# Altium PCB RGB_driver_AC_2.PcbDoc
Units mm, origin at the board's own origin, x right, y up, seen from the top; angles counter-clockwise.
Board outline 80 x 43 mm, 2 copper layers (Top Layer, Bottom Layer), stack 1.635 mm thick; 70 components, 43 nets, 178 pads, 21 vias.
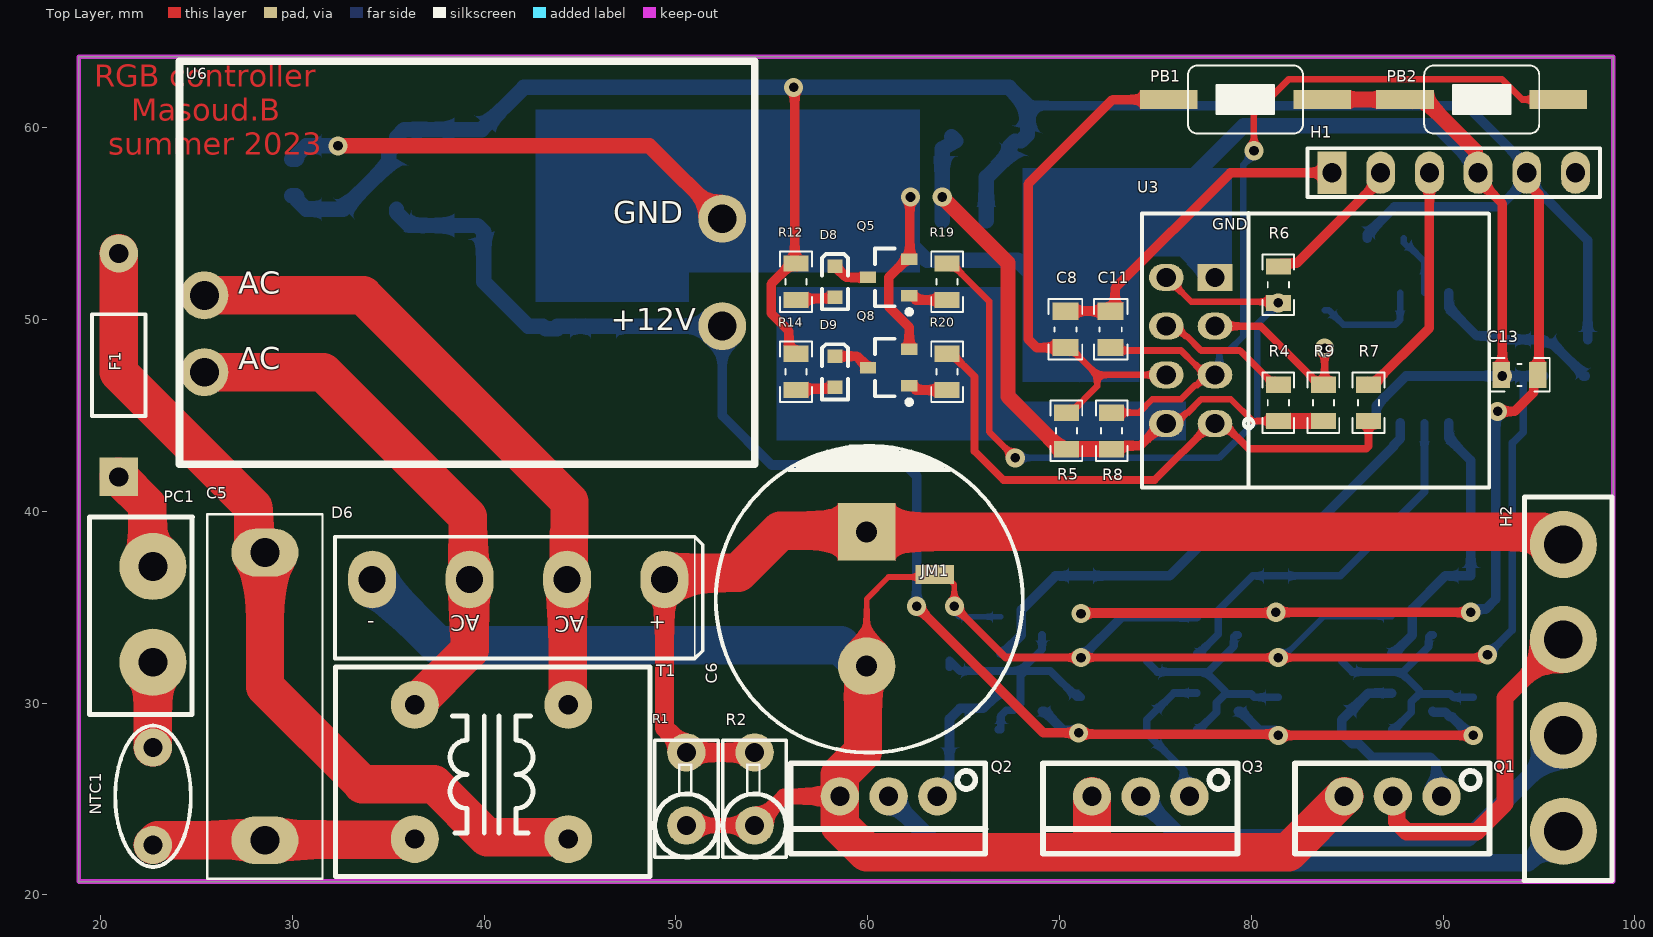
[diagram p0: Top Layer view]
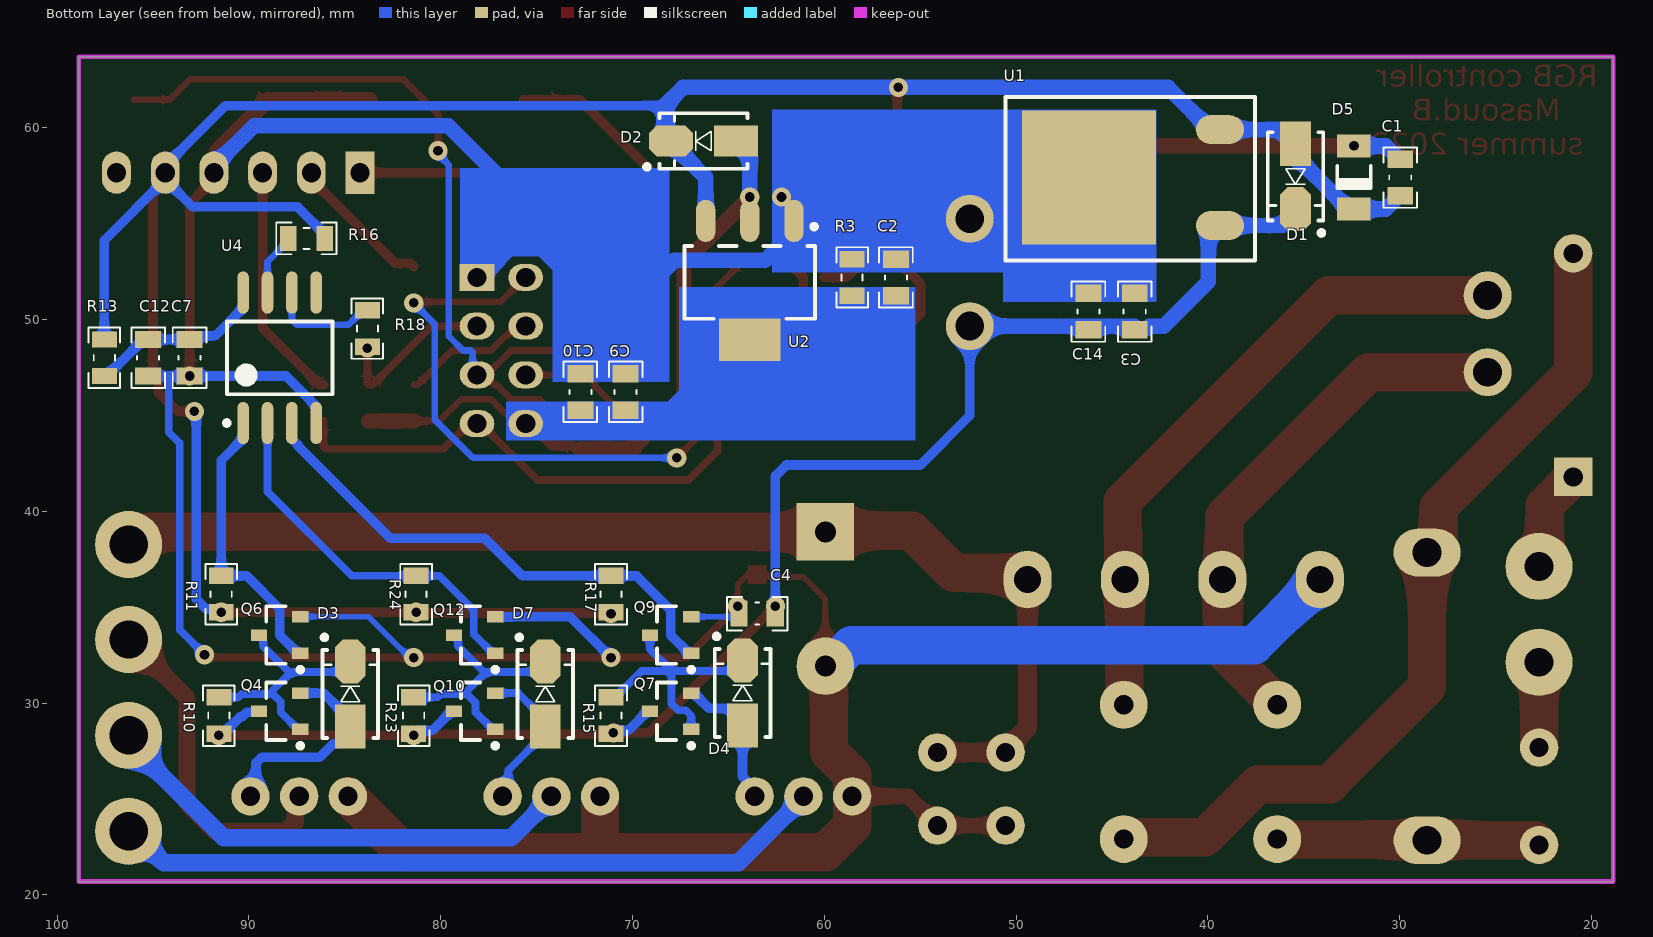
[diagram p1: Bottom Layer view, seen from below]
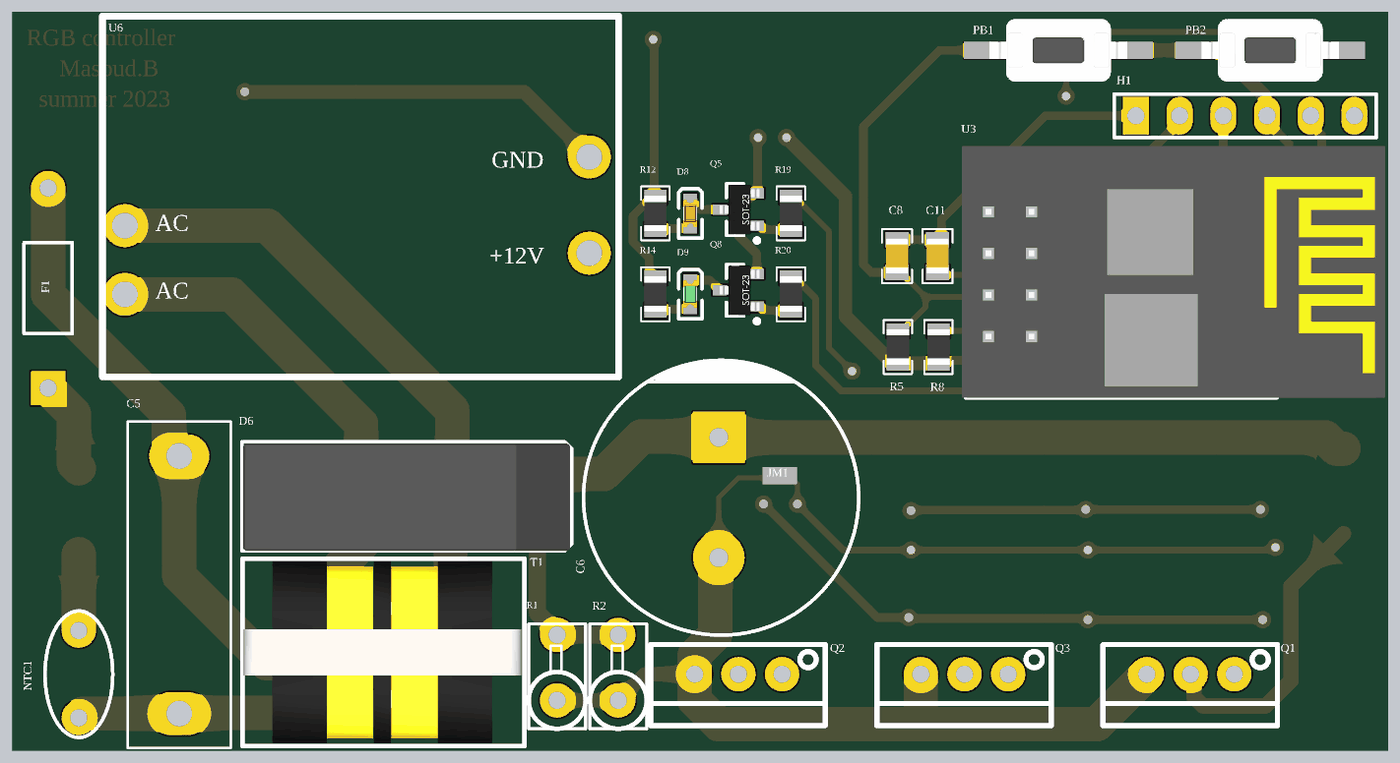
[diagram p2: 3D render of the assembled board from above, using the file's embedded part models]
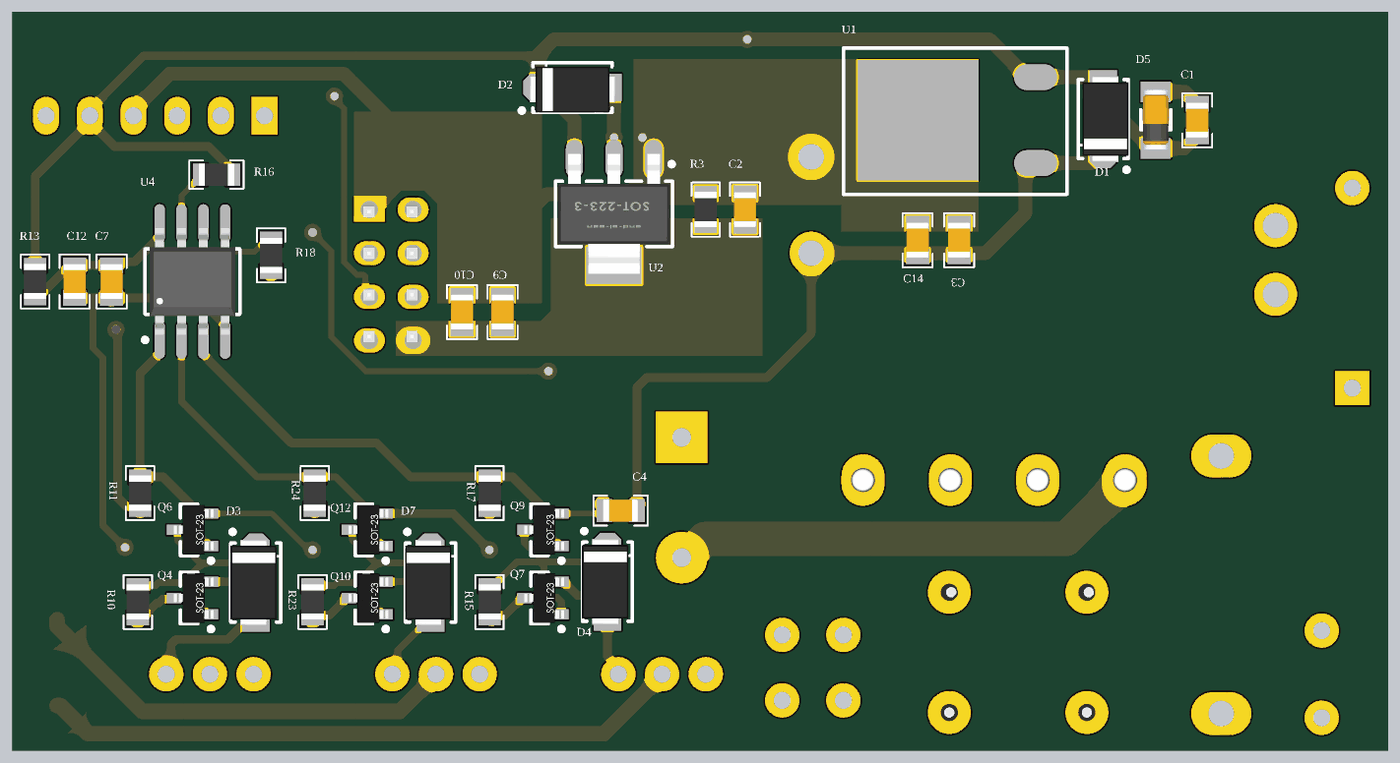
[diagram p3: 3D render of the assembled board from below, using the file's embedded part models]

## Layer stack, top to bottom
Top Solder: solder mask 0.0102, Solder Resist, Dk 3.5
Top Layer: signal copper 0.0175
Dielectric 1: dielectric 1.6, FR-4, Dk 4.8
Bottom Layer: signal copper 0.0175
Bottom Solder: solder mask 0.0102, Solder Resist, Dk 3.5

## Board outline
18.867,20.701 18.867,63.701 98.867,63.701 98.867,20.701

## Design rules (kind name [scope] priority, off if disabled: settings)
Clearance [All] p1: gap=0.4 ignorepadtopadclearanceinfootprint=TRUE except(0: Arc-Hole Track-Hole SMDPad-Hole THPad-Hole Via-Hole Fill-Hole Poly-Hole Region-Hole Text-Hole)
ComponentClearance [All] p1: gap=0.2 collisioncheckmode=3 verticalgap=0.1 showdistances=FALSE
Height [All] p1 off: minheight=0 maxheight=25.4 prefheight=12.7
PolygonConnect [All] p1: connectstyle=Relief reliefconductorwidth=0.254 reliefentries=4 polygonreliefangle="90 Angle" airgapwidth=0.254
RoomDefinition power [InComponentClass('power')] p1 off: confinementstyle=ConfineIn formatcopy=TRUE lockcomponents=FALSE outline 178.943,71.247 345.186,71.247 345.186,93.853 178.943,93.853
RoomDefinition micro [InComponentClass('micro')] p2 off: confinementstyle=ConfineIn formatcopy=TRUE lockcomponents=FALSE outline 226.761,109.728 324.043,109.728 324.043,138.176 226.761,138.176
RoomDefinition driver [InComponentClass('driver')] p3 off: confinementstyle=ConfineIn formatcopy=TRUE lockcomponents=FALSE outline 210.124,38.1 303.088,38.1 303.088,51.435 210.124,51.435
RoutingVias [All] p1: holewidth=0.7 width=1.2 viastyle="Through Hole" minholewidth=0.5 minwidth=1 maxholewidth=1 maxwidth=1.5
SolderMaskExpansion [All] p1: expansion=0.102 istentingtop=FALSE
Width [All] p1: maxlimit=2 minlimit=0.3 preferedwidth=0.3
28 further rules are at their usual default settings.

## Classes and differential pairs
component class power: C1 C2 C3 C5 C6 C14 D1 D2 D5 D6 F1 JM1 NTC1 PC1 R1 R2 R3 T1 U1 U2 U6
component class micro: C8 C9 C10 C11 D8 D9 H1 PB1 PB2 Q5 Q8 R4 R5 R6 R7 R8 R9 R12 R14 R19 R20 U3
component class driver: C4 C7 C12 C13 D3 D4 D7 H2 H-1 Q1 Q2 Q3 Q4 Q6 Q7 Q9 Q10 Q12 R10 R11 R13 R15 R16 R17 R18 R23 R24 U4

## Components (designator, comment, footprint, x,y, rotation, side; value= is the part's Value field where it differs from the comment)
C1 "cap 10uF" CAP0805 29.972,57.404 r90 bottom value=10uF
C2 "cap 10uF" CAP0805 56.261,52.197 r90 bottom value=10uF
C3 "cap 10uF" CAP0805 43.815,50.419 r90 bottom value=10uF
C4 "cap 100nF" CAP0805 63.5,34.671 r0 bottom value=100nF
C5 "cap 220nF" MKT-15mm 28.575,30.353 r90 top locked value=220nF
C6 "cap 47uF" CAP16MM 60.071,35.433 r270 top locked value=47uF
C7 "cap 100nF" CAP0805 93.091,48.006 r270 bottom value=100nF
C8 "cap 100nF" CAP0805 70.308,49.488 r90 top value=100nF
C9 "cap 100nF" CAP0805 70.358,46.228 r270 bottom value=100nF
C10 "cap 1uF" CAP0805 72.717,46.228 r90 bottom value=1uF
C11 "cap 10uF" CAP0805 72.667,49.488 r90 top value=10uF
C12 "cap 10uF" CAP0805 95.25,48.006 r270 bottom value=10uF
C13 "cap 10uF" CAP0805 93.98,47.117 r180 top value=10uF
C14 "cap 100nF" CAP0805 46.228,50.419 r90 bottom value=100nF
D1 "uf4007" DIOM4629X24N 35.433,57.465 r270 bottom
D2 "uf4007" DIOM4629X24N 66.294,59.309 r0 bottom
D3 "1n5822" DIOM4629X24N 84.709,30.48 r90 bottom
D4 "1n5822" DIOM4629X24N 64.262,30.529 r90 bottom
D5 "5.1V" "Diode 1n4148 SMD" 32.385,59.055 r270 bottom
D6 "KBP410" "Bridge KBL PACKAGE" 41.783,36.449 r180 top locked
D7 "1n5822" DIOM4629X24N 74.549,30.48 r90 bottom
D8 "RED" "LED_0603 R" 58.293,51.972 r90 top
D9 "GREEN" "LED_0603 G" 58.293,47.273 r90 top
F1 "1A" PIN-W2/E2.8 20.955,47.625 r90 top
H1 "H-1x6" H-1x6 90.678,57.658 r0 top locked
H2 "Phonix 4" "PHOENIX TERMINAL R 4" 116.205,20.748 r90 top
JM1 "Short Jumper" SHORT_BRIDGE 63.5,36.703 r0 top net-tie
NTC1 "NTC 10d9" CAPNTO5.08-7.37x3.94 22.733,25.146 r90 top
PB1 "Push-Button-tall" tack-sw-3x5x6 79.693,61.468 r180 top locked
PB2 "Push-Button-tall" tack-sw-3x5x6 92.011,61.468 r0 top locked
PC1 "Power Connector" "phoenix terminal R 2" 2.794,39.704 r270 top
Q1 "FQPF2N60C" TO-220 87.376,25.146 r180 top
Q2 "FQPF2N60C" TO-220 61.087,25.146 r180 top
Q3 "FQPF2N60C" TO-220 74.231,25.146 r180 top
Q4 "2N2222" SOT23_BEC_L 88.392,29.578 r0 bottom
Q5 "2N2222" SOT23_BEC_L 61.087,52.197 r180 top
Q6 "2N2222" SOT23_BEC_L 88.392,33.552 r0 bottom
Q7 "2N2222" SOT23_BEC_L 68.013,29.578 r0 bottom
Q8 "2N2222" SOT23_BEC_L 61.087,47.498 r180 top
Q9 "2N2222" SOT23_BEC_L 68.013,33.552 r0 bottom
Q10 "2N2222" SOT23_BEC_L 78.232,29.578 r0 bottom
Q12 "2N2222" SOT23_BEC_L 78.232,33.552 r0 bottom
R1 "Res 220K" RES-(1/2)-Stand 50.546,23.622 r90 top value=220K
R2 "Res 220K" RES-(1/2)-Stand 54.102,23.622 r90 top value=220K
R3 "Res 330R" RES0805 58.547,52.197 r270 bottom value=330R
R4 "Res 1K" RES0805 81.407,45.659 r90 top value=1K
R5 "Res 1K" RES0805 70.358,44.196 r90 top value=1K
R6 "Res 10R" RES0805 81.407,51.816 r90 top value=10R
R7 "Res 10R" RES0805 86.106,45.659 r270 top value=10R
R8 "Res 1K" RES0805 72.717,44.196 r270 top value=1K
R9 "Res 1K" RES0805 83.757,45.659 r270 top value=1K
R10 "Res 1K" RES0805 91.567,29.353 r270 bottom value=1K
R11 "Res 1K" RES0805 91.44,35.687 r90 bottom value=1K
R12 "Res 220" RES0805 56.261,51.972 r90 top value=220
R13 "Res 100R" RES0805 97.536,48.006 r90 bottom value=100R
R14 "Res 220" RES0805 56.261,47.273 r90 top value=220
R15 "Res 1K" RES0805 71.12,29.353 r270 bottom value=1K
R16 "Res 0R" RES0805 86.995,54.229 r180 bottom value=0R
R17 "Res 1K" RES0805 71.12,35.687 r90 bottom value=1K
R18 "Res 10R" RES0805 83.82,49.53 r90 bottom value=10R
R19 "Res 10K" RES0805 64.135,51.972 r270 top value=10K
R20 "Res 10K" RES0805 64.135,47.273 r270 top value=10K
R23 "Res 1K" RES0805 81.407,29.353 r270 bottom value=1K
R24 "Res 1K" RES0805 81.28,35.687 r90 bottom value=1K
T1 "UUD9-EMI filter" UUD9.8 40.386,26.416 r180 top locked
U1 "L7805CV" REG-7805-smd 39.37,57.404 r90 bottom
U2 "AMS1117-3.3" SOT223 63.881,51.943 r270 bottom
U3 "Header4*2Pin Female" ESP8266-01/ESP-01 78.105,48.387 r0 top locked
U4 "WS2811 SMD" 8S2_N 88.392,48.006 r90 bottom
U6 "Offline power supply module" "220AC-12VDC  450MA" 39.116,52.959 r0 top locked

## Footprints (in the part's own frame and the unit in brackets; to place one, negate y for a bottom-side part, rotate by r counter-clockwise, add the part's x,y. Pads: shape width x height; smd on the part's side, far side on the other; paste and mask are expansions set on the pad)
8S2_N [mm] "SOP, 8-Leads, Body 5.3x5.3mm, Pitch 1.27mm, IPC Medium Density"
  oval 2.2x0.6 smd: 1(-3.4,1.905) 2(-3.4,0.635) 3(-3.4,-0.635) 4(-3.4,-1.905) 5(3.4,-1.905) 6(3.4,-0.635) 7(3.4,0.635) 8(3.4,1.905)
  silkscreen extent -3.52,-2.75 1.9,2.88, body extent -3.1,-2.5 3.1,2.5, height 1.75
"220AC-12VDC  450MA" [mm] "110/220V AC to 12V DC 450mA Power Module"
  round 2.5 hole 1.5: 1(-13.7,-5.7) 2(-13.7,-1.7) 3(13.3,-3.3) 4(13.3,2.3)
  silkscreen extent -15,-10.5 15,10.5
"Bridge KBL PACKAGE" [mm] "KBL Bridge Rectifiers DESIGNER :ABBAS BASEREH"
  oval 2.5x3 hole 1.4: 1(-7.62,0) 2(-2.54,0) 3(2.54,0) 4(7.62,0)
  silkscreen extent -9.61,-2.22 9.56,4.13, body extent -9.51,-2.12 9.49,4.13, height 16.05
CAP16MM [mm]
  rect 3x3 hole 1.1: 1(-3.5,-0.127)
  round 3 hole 1.1: 2(3.5,-0.127)
  silkscreen extent -8,-7.99 8.01,8.01, body extent -8,-8 8,8, height 15
CAP0805 [mm] "Chip Capacitor, 2-Leads, Body 2/00x1/25mm, IPC Medium Density DESIGNER:ABBAS BASEREH"
  rect 0.9x1.35 smd: 1(-0.95,0) 2(0.95,0)
  silkscreen extent -1.58,-0.87 1.58,0.87, body extent -1.02,-0.65 1.02,0.65, height 0.5
CAPNTO5.08-7.37x3.94 [mm] "Capacitor, Radial, Tantalum, Non-Polarised; Body 7.37 x 3.94 x 6.86 mm (WxTxH max); Pin Spacing 5.08 mm (typ)"
  round 2 hole 1: 1(-2.54,0) 2(2.54,0)
  silkscreen extent -3.68,-1.98 3.68,1.96
"Diode 1n4148 SMD" [mm] "Mini MELF SOD-80"
  rect 1.2x1.75 smd: 1(0,0) 2(3.3,0)
  silkscreen extent 1.04,-0.87 2.22,0.88, body extent -0.13,-0.75 3.37,0.75, height 1.55
DIOM4629X24N [mm] "Molded Diode, 2-Leads, Body 4/60x2/90mm, IPC Medium Density-Design:Abbas Basereh"
  rect 2.3x1.6 smd: 1(-1.7,0)
  oct 2.3x1.6 smd: 2(1.7,0)
  silkscreen extent -2.3,-1.45 3.07,1.47, body extent -2.5,-1.22 2.5,1.48, height 2.2
ESP8266-01/ESP-01 [mm]
  oval 1.8x1.4 hole 1: 1(0,-3.81) 2(0,-1.27) 3(0,1.27) 5(-2.54,3.81) 6(-2.54,1.27) 7(-2.54,-1.27) 8(-2.54,-3.81)
  rect 1.8x1.4 hole 1: 4(0,3.81)
  silkscreen extent -3.81,-7.15 14.3,7.17, body extent -4.02,-7.15 20.57,7.5, height 10
H-1x6 [mm]
  rect 1.5x2.2 hole 1: 1(-6.477,0)
  oval 1.5x2.2 hole 1: 2(-3.937,0) 3(-1.397,0) 4(1.143,0) 5(3.683,0) 6(6.223,0)
  silkscreen extent -7.75,-1.27 7.49,1.27
"LED_0603 G" [mm]
  rect 0.7x0.8 smd: 1(-0.812,0) 2(0.813,0)
  silkscreen extent -1.44,-0.67 1.44,0.68, body extent -0.8,-0.4 0.8,0.4, height 0.6
"LED_0603 R" [mm]
  rect 0.7x0.8 smd: 1(-0.813,0) 2(0.813,0)
  silkscreen extent -1.44,-0.67 1.44,0.67, body extent -0.8,-0.4 0.8,0.4, height 0.6
MKT-15mm [mm]
  oval 2.5x3.5 hole 1.5: 1(-7.5,0) 2(7.5,0)
  silkscreen extent -9.5,-3 9.5,3
"phoenix terminal R 2" [mm] "2 Right terminals"
  round 3.5 hole 1.5: 1(2.573,19.939) 2(7.573,19.939)
  silkscreen extent 0,16.64 10.29,22
"PHOENIX TERMINAL R 4" [mm] "4 Right terminals"
  round 3.5 hole 2: 1(2.573,19.939) 2(7.573,19.939) 3(12.573,19.939) 4(17.526,19.939)
  silkscreen extent 0,17.4 20,22
PIN-W2/E2.8 [mm] "Thru-Hole; 2 Leads"
  rect 2x2 hole 1: 1(-5.825,0)
  round 2 hole 1: 2(5.825,0)
  silkscreen extent -2.65,-1.4 2.65,1.4
REG-7805-smd [mm]
  oval 1.5x2.5 smd: 1(-2.5,0) 3(2.5,0)
  rect 7x7 smd: 2(0,6.825)
  silkscreen extent -4.32,-1.82 4.19,11.18
RES0805 [mm] "Chip Resistor, 2-Leads, Body 2/00x1/25mm, IPC Medium Density DESIGNER:ABBAS BASEREH"
  rect 0.85x1.3 smd: 1(-0.95,0) 2(0.95,0)
  silkscreen extent -1.58,-0.82 1.58,0.82, body extent -1.02,-0.65 1.02,0.65, height 0.5
RES-(1/2)-Stand [mm]
  round 2 hole 1: 1(0,0) 2(3.81,0)
  silkscreen extent -1.65,-1.65 4.44,1.65, body extent -1.66,-1.67 4.14,1.67, height 11
SHORT_BRIDGE [mm]
  rect 1x1 smd mask+0.102: 1(-0.5,0) 2(0.5,0)
  Top Layer region: -0.5,-0.5 0.5,-0.5 0.5,0.5 -0.5,0.5
  body extent -1.02,-0.51 1.02,0.51
SOT23_BEC_L [mm] "SOT23, 3-Leads, Body 2.9x1.3mm, Pitch 0.95mm, Lead Span 2.4mm, IPC High Density"
  rect 0.85x0.6 smd: 1(-1.075,0.95) 2(-1.075,-0.95) 3(1.075,0)
  silkscreen extent -1.2,-1.5 0.7,1.92, body extent -1.23,-1.45 1.07,1.45, height 1
SOT223 [mm] "SOT223, 4-Leads, Body 6.5x3.5mm, Pitch 2.30mm-Designer Abbas Basereh"
  oval 2.2x1 smd: 1(-3.2,2.3) 2(-3.2,0) 3(-3.2,-2.3)
  rect 2.2x3.2 smd: 4(3,0)
  Top Layer pour cut-out: -1.7,3.556 1.7,3.556 1.7,-3.556 -1.7,-3.556
  silkscreen extent -3.02,-3.4 1.9,3.47, body extent -3.5,-3.25 3.5,3.25, height 1.7
tack-sw-3x5x6 [mm]
  rect 3x1 smd mask+0.05: 1(-4,0) 2(4,0)
  silkscreen extent -3,-1.78 3,1.78, body extent -4,-1.75 4,1.75, height 4.3
TO-220 [mm]
  round 2 hole 1: 1(-2.54,0) 2(0,0) 3(2.54,0)
  silkscreen extent -5.05,-1.72 5.1,3, body extent -5.05,-1.72 5.1,3, height 15.87
UUD9.8 [mm] "Line filter"
  round 2.5 hole 1: 1(4,3.5) 2(-4,-3.5) 3(-4,3.5) 4(4,-3.5)
  silkscreen extent -8.25,-5.46 8.13,5.46, body extent -8.08,-5.3 8.08,5.3, height 15.3

## Part data
C1 C2 C3 C12 C13: library part "Cap Pol1", "CAP seramic", LatestRevisionDate=17-Jul-2002, LatestRevisionNote="Re-released for DXP Platform.", PackageDescription="Polarized Capacitor (Radial); 2 Leads", PackageReference=RB7.6-15, Published=8-Jun-2000, Publisher="Altium Limited"
C4 C7 C8 C9 C10 C11 C14: library part "Cap ceramic", "CAP seramic"
C5: library part Cap, "Cap MKT 275V", LatestRevisionDate=17-Jul-2002, LatestRevisionNote="Re-released for DXP Platform.", PackageDescription="Radial Cap, Thru-Hole; 2 Leads; 0.3 in Pin Spacing", PackageReference=RAD-0.3, Published=8-Jun-2000, Publisher="Altium Limited"
C6: library part "Cap Pol1", "Polarized Capacitor (Radial) 400V", LatestRevisionDate=17-Jul-2002, LatestRevisionNote="Re-released for DXP Platform.", PackageDescription="Polarized Capacitor (Radial); 2 Leads", PackageReference=RB7.6-15, Published=8-Jun-2000, Publisher="Altium Limited"
D1 D2: library part "1n4007 SMD M7", "Standard Rectifiers", Manufacturer="DC COMPONENTS", Data=16-12-2016, Designer="Abbas Basereh", Link=http://www.tme.eu/en/details/m7/smd-universal-diodes/dc-components/, Part. No=M7
D3 D4 D7: library part "1n4007 SMD M7", "Schotcky diode", Manufacturer="DC COMPONENTS", Data=16-12-2016, Designer="Abbas Basereh", Link=http://www.tme.eu/en/details/m7/smd-universal-diodes/dc-components/, Part. No=M7
D5: library part "D Zener", "Zener Diode", LatestRevisionDate=17-Jul-2002, LatestRevisionNote="Re-released for DXP Platform.", PackageDescription="Diode, Thru-Hole; 2 Leads; 0.7 in Pin Spacing", PackageReference=DIODE-0.7, Published=8-Jun-2000, Publisher="Altium Limited"
D6: library part "Diode Bridge", "Diode Bridge", Company=E.P.I.L, Design Date=2011/11/02
D8 D9: library part LED0, "Typical INFRARED GaAs LED", LatestRevisionDate=08-Jul-2005, LatestRevisionNote="Mech Layer 1 removed.", PackageDescription="LED; 2 Leads", PackageReference=LED-0, Published=8-Jun-2000, Publisher="Altium Limited"
F1: library part "Fuse 2", "Fuse", LatestRevisionDate=17-Jul-2002, LatestRevisionNote="Re-released for DXP Platform.", PackageDescription="Thru-Hole; 2 Leads", PackageReference=PIN-W2/E2.8, Published=8-Jun-2000, Publisher="Altium Limited"
H1: "Bluetooth module HC05"
H2: library part "Header 4", "Header, 4-Pin", LatestRevisionDate=17-Jul-2002, LatestRevisionNote="Re-released for DXP Platform.", Publisher="Altium Limited"
JM1: library part "Solder Jumper", "short circuit"
NTC1: library part "Res Thermal", "NTC", Code_IPC=RESC2012, LatestRevisionDate=29-May-2009, LatestRevisionNote="IPC-7351 Footprint Added.", PackageDescription="Chip Resistor 0805 Case Size", PackageReference=6-0805, PackageVersion=Mar-2003, Published=24-Mar-1999, Publisher="Altium Limited"
PC1: "white Power Connector"
Q1 Q2 Q3: library part MOSFET-N, "N-Channel MOSFET", LatestRevisionDate=17-Jul-2002, LatestRevisionNote="Re-released for DXP Platform.", PackageDescription="TO, Flat Index; 3 In-Line, Axial Leads; Body Dia. 4.6mm; Lead Dia. 0.5 mm (max)", PackageReference=E3, PackageVersion=1995/1996, Published=8-Jun-2000, Publisher="Altium Limited"
Q4 Q5 Q6 Q7 Q8 Q9 Q10 Q12: library part 2N3904, "NPN General Purpose Amplifier", ComponentLink1Description="Manufacturer Link", ComponentLink1URL=http://www.fairchildsemi.com/, ComponentLink2Description=Datasheet, ComponentLink2URL=http://www.fairchildsemi.com/ds/2N%2F2N3904.pdf, DatasheetVersion=1997, LatestRevisionDate=15-Jan-2003, LatestRevisionNote="PCB Footprint 'BCY-W3/D4.7' replaced", PackageDescription="TO, Flat Index; 3 In-Line, Axial Leads; Body Dia. 4.5mm; Leads 0.51 x 0.48 mm (max)", PackageReference=TO-92A, PackageVersion=Sep-1998, Published=8-Jun-2000, Publisher="Altium Limited"
R1 R2 R3 R4 R5 R6 R7 R8 R9 R10 R11 R12 R13 R14 R15 R16 R17 R18 R19 R20 R23 R24: library part Res1, "Resistor", LatestRevisionDate=17-Jul-2002, LatestRevisionNote="Re-released for DXP Platform.", PackageDescription="Axial Device, Thru-Hole; 2 Leads; 0.3 in Pin Spacing", PackageReference=AXIAL-0.3, Published=8-Jun-2000, Publisher="Altium Limited"
T1: library part "Trans Cupl", "Line filter", LatestRevisionDate=17-Jul-2002, LatestRevisionNote="Re-released for DXP Platform.", PackageDescription="Transformer; 4 Leads", PackageReference=TRF_4, Published=8-Jun-2000, Publisher="Altium Limited"
U1: library part "L7805CV-Linear Voltage Regulator IC Positive 1 Output 5V 1.5A TO-220AB", "Linear Voltage Regulator IC Positive FIXED", Manufacturer=STMicroelectronics, Designer="Abbas Basereh", Link=https://www.aliexpress.com/item/, Part. No=L7805CV
U2: library part AMS1117-x.x, "x.x Volt, 800mA Low-Dropout Linear Regulator, 4-pin SOT-223", Data=16-12-2016, Designer="Ali Hafizi"
U3: library part ESP8266-01/ESP-01, "ESP-01 wifi module", Package=None, Availability=Unavailable, MF=AI-Thinker, MP=ESP8266-01/ESP-01, Price=None, SnapEDA_Link=https://www.snapeda.com/parts/ESP8266-01/ESP-01/AI-Thinker/view-part/106413/?ref=snap
U4: "LED Driver IC 3 Output Linear 18.5mA Module 10PK", Supplier Part Number 1=WS2811, ComponentAvailability="Not recommended for new design.", ComponentLink1Description="LED Driver IC 3 Output Linear 18.5mA Module 10PK", ComponentLink1URL=http://www.world-semi.com, ComponentLink2Description=WS2811, ComponentLink3Description=WS2811, ComponentLink4Description=http://www.world-semi.com, DatasheetVersion=30-1-2017, PackageDescription=SOP-8, PackageReference=8S2, PackageVersion=30-1-2017, Published=2017-1-30, Publisher="Abbas Basereh", Supplier 1=Digi-Key, Supplier 2=Farnell, Supplier 3=Mouser, Supplier Part Number 2=1378, Supplier Part Number 3=1528-1537-ND
U6: library part "Power Supply Module"

## Via types
v1: diameter 1, hole 0.5, Top Layer to Bottom Layer, tented both sides, 21 vias

## Nets (pads, with @x,y where several pads share a name; then routed paths per layer and width w, separated by ;. In a path a pad name is that pad's centre, name@x,y a point inside that pad or via, vN(x,y) a via of type N, cw(c..) or ccw(c..) an arc to the next point about the centre after c; other vN are vias at no path point)
+3v3: C2.1 C9.2 C10.1 D2.1 R3.2 R4.1 R5.1 R8.2 R9.2 U2.2 U2.4 U3.8 | length 57.9
  Top Layer w0.34: U3.8 76.052,44.577 76.582,45.107 76.639,45.107 77.379,45.847 78.931,45.847 80.069,44.709 R4.1
  Top Layer w0.5: R8.2 72.942,43.246 73.117,43.421 74.209,43.421 75.365,44.577 U3.8
  Top Layer w0.8: v1(63.881,56.388) 67.31,52.959 67.31,45.988 70.052,43.246 R8.2 ; R4.1 R9.2
  Bottom Layer w0.8: C2.1 61.077,51.247 63.381,48.943 U2.4 64.381,48.943 68.046,45.278 C10.1 74.592,45.278 75.293,44.577 U3.8 ; U2.2 v1(63.881,56.388) 63.881,58.909 D2.1 D2.1@64.365,59.538
+5: C1.1 C13.1 D1.1 D2.2 D5.2 H1.5 R11.1 R12.2 R13.2 R14.2 R16.2 R17.1 R24.1 U1.3 U2.3 | length 157.7
  Top Layer w0.5: v1(56.134,62.103) 56.197,62.039 56.197,52.985 R12.2 56.036,52.922 54.961,51.847 54.961,50.328 55.891,49.398 55.891,48.398 56.066,48.223 R14.2 ; v1(71.12,34.671) 71.153,34.704 81.247,34.704 v1(81.28,34.737) v1(91.44,34.737) ; v1(92.837,45.212) 93.726,45.212 94.73,46.216 94.73,46.917 C13.1 ; H1.5 94.361,57.15 94.996,56.515 C13.1@94.996,47.117
  Bottom Layer w0.5: 68.326,61.151 91.218,61.151 94.361,58.008 H1.5 H1.5@94.361,57.308 ; v1(71.12,34.671) R17.1 ; R16.2 86.045,54.454 87.464,55.873 92.926,55.873 H1.5@94.361,57.308 ; v1(91.44,34.737) 91.615,34.912 92.224,34.912 92.74,35.428 92.74,44.761 92.741,44.763 92.741,45.116 v1(92.837,45.212) ; R13.2 97.536,54.133 H1.5@94.361,57.308
  Bottom Layer w0.8: C1.1 30.197,56.454 30.247,56.404 30.247,56.224 30.716,55.755 D5.2 32.66,55.755 35.033,58.128 35.033,58.765 D1.1 35.433,59.504 35.833,59.904 U1.3 39.87,59.904 42.069,62.103 v1(56.134,62.103) 67.374,62.103 68.326,61.151 68.326,59.641 D2.2 ; U2.3 66.181,57.418 67.41,58.647 67.41,59.042 D2.2@67.677,59.309
+12: C3.1 C4.1 C14.1 D1.2 Q4.3 Q7.3 Q10.3 R10.2 R15.2 R23.2 U1.1 U6.3 | length 83.8
  Top Layer w0.5: v1(62.55,35.052) 69.154,28.448 v1(70.993,28.448) 71.056,28.384 81.343,28.384 v1(81.407,28.321) v1(91.567,28.321)
  Bottom Layer w0.5: U6.3 52.416,44.993 54.991,42.418 61.976,42.418 62.55,41.844 v1(62.55,35.052) ; Q7.3 69.213,29.578 70.213,28.578 70.945,28.578 R15.2 71.038,28.403 v1(70.993,28.448) ; Q10.3 79.432,29.578 80.432,28.578 81.232,28.578 R23.2 ; Q4.3 89.517,29.528 90.113,29.528 90.356,29.286 90.46,29.286 91.342,28.403 R10.2 v1(91.567,28.321)
  Bottom Layer w0.8: D1.2 35.433,55.58 36.109,54.904 U1.1 39.65,54.904 39.974,54.581 39.974,51.974 42.289,49.659 43.071,49.659 43.211,49.519 C3.1@43.815,49.519 ; C3.1@43.815,49.659 46.228,49.659 U6.3
+300V_DC: C6.1 D6.1 H2.4 R1.2 R2.2 | length 61.3
  Top Layer w1: D6.1 49.403,28.717 50.546,27.574 R1.2 R2.2
  Top Layer w2: D6.1 49.403,36.564 49.634,36.795 53.25,36.795 55.444,38.989 59.888,38.989 C6.1 95.201,38.933 95.86,38.274 H2.4
BLUE: H2.1 Q2.2 | length 37.3
  Bottom Layer w0.9: Q2.2 61.087,25.07 64.479,21.678 94.439,21.678 96.082,23.321 H2.1
Bluetooth_state: C8.2 C11.2 H1.1 | length 17.5
  Top Layer w0.5: C8.2 C11.2 72.697,50.438 72.897,50.638 72.897,51.638 78.91,57.651 81.302,57.651 81.309,57.658 H1.1
En: H1.6
Gate1: D3.1 Q1.1 Q4.2 | length 11.3
  Bottom Layer w0.5: Q4.2 86.107,30.528 84.709,29.13 D3.1 84.709,28.43 85.259,27.88 85.609,27.88 86.311,27.178 89.336,27.178 89.629,26.885 89.629,25.433 Q1.1
Gate2: D4.1 Q2.1 Q7.2 | length 7.5
  Bottom Layer w0.5: Q2.1 63.627,25.552 64.262,26.187 D4.1 64.262,29.179 64.812,29.729 66.014,29.729 66.813,30.528 Q7.2
Gate3: D7.1 Q3.1 Q10.2 | length 8.1
  Bottom Layer w0.4: Q3.1 76.465,25.452 76.465,26.514 74.549,28.43 D7.1 74.549,29.13 75.947,30.528 Q10.2
GND: C1.2 C2.2 C3.2 C4.2 C7.2 C9.1 C10.2 C12.2 C13.2 C14.2 D5.1 H1.4 JM1.2 PB1.1 PB2.1 Q5.2 Q6.2 Q8.2 Q9.2 Q12.2 R3.1 U1.2 U2.1 U3.4 U4.4 U6.4 | length 205.5
  Top Layer w0.3: JM1.2 64.516,36.187 v1(64.516,35.052)
  Top Layer w0.4: v1(64.516,35.052) 67.191,32.377 v1(71.12,32.377) v1(81.407,32.377) 92.159,32.377 v1(92.311,32.53)
  Top Layer w0.5: Q8.2 62.162,49.603 61.087,50.678 61.087,52.197 62.071,53.181 62.196,53.181 62.196,56.354 v1(62.23,56.388) ; H1.4 91.821,57.308 93.091,56.038 v1(93.091,47.056) 93.03,46.995 C13.2@93.03,47.026
  Top Layer w0.8: v1(32.385,59.055) 48.62,59.055 U6.4 ; PB1.1 PB2.1 89.011,61.468 91.687,58.792 91.687,57.792 H1.4
  Bottom Layer w0.3: v1(64.516,35.052) 64.516,34.761 64.775,34.502 Q9.2 ; v1(81.407,32.377) 81.632,32.377 83.757,34.502 Q6.2
  Bottom Layer w0.4: C3.2 46.128,51.369 C14.2@46.178,51.419 ; v1(92.311,32.53) 93.599,33.817 93.599,43.561 94.168,44.13 94.168,47.056 ; v1(93.091,47.056) C7.2@93.228,47.056
  Bottom Layer w0.5: v1(71.12,32.377) 73.245,34.502 Q12.2 ; U4.4 86.506,44.625 86.506,45.499 88.063,47.056 v1(93.091,47.056) ; C7.2@93.228,47.056 C12.2
  Bottom Layer w0.8: C1.2 30.197,58.354 30.247,58.404 30.247,58.586 30.716,59.055 v1(32.385,59.055) ; C14.2@46.178,51.419 C14.2 U1.2@46.228,57.371 ; U1.2 U1.2@46.228,57.371 ; U2.1@61.581,54.543 60.185,53.147 C2.2 54.528,53.147 U6.4 48.34,55.259 U1.2@46.228,57.371 ; U2.1 61.581,54.597 63.092,53.086 67.818,53.086 70.358,50.546 C9.1 ; C9.1@70.788,47.383 70.993,47.178 C10.2 72.717,51.67 74.744,53.697 76.405,53.697 77.905,52.197 U3.4 ; 72.39,53.467 73.533,53.467 73.768,53.702 73.768,54.27 79.599,60.101 89.728,60.101 91.821,58.008 H1.4
GNDP: C6.2 D6.4 JM1.1 Q1.3 Q2.3 Q3.3 R1.1 R2.1 | length 83.3
  Top Layer w0.3: C6.2 59.944,35.433 61.087,36.576 62.873,36.576 JM1.1
  Top Layer w0.8: R1.1 R2.1 55.626,25.146 Q2.3
  Top Layer w2: C6.2 59.753,31.742 59.753,27.471 58.547,26.265 Q2.3 58.547,23.625 59.944,22.228 71.755,22.228 ; Q3.3 71.691,22.291 71.755,22.228 ; Q1.3 81.918,22.228 71.755,22.228
  Bottom Layer w2: D6.4 34.163,36.334 34.548,35.949 34.663,35.949 37.592,33.02 58.586,33.02 59.673,31.933 C6.2
GREEN: H2.2 Q3.2 | length 25.4
  Bottom Layer w0.9: Q3.2 74.231,25.07 76.323,22.978 91.304,22.978 96.266,27.94 H2.2
IO0: C11.1 PB2.2 R8.1 U3.2 | length 43.6
  Top Layer w0.34: C11.1 72.818,48.387 76.332,48.387 77.072,47.647 77.088,47.647 77.618,47.117 U3.2@77.706,47.117 ; R8.1 74.138,45.146 74.839,45.847 76.332,45.847 77.072,46.587 77.176,46.587 U3.2@77.706,47.117 ; U3.2 U3.2@77.706,47.117 ; v1(80.137,58.801) 80.137,60.718 81.957,62.538 93.051,62.538 94.121,61.468 PB2.2
  Bottom Layer w0.34: U3.2 78.337,47.349 78.337,48.295 78.43,48.387 78.831,48.387 79.575,49.131 79.575,58.06 80.137,58.622 v1(80.137,58.801)
IO2: R9.1 R18.1 U3.3 | length 8.9
  Top Layer w0.4: U3.3 80.484,49.657 83.531,46.609 R9.1 83.82,46.673 v1(83.82,48.514)
  Bottom Layer w0.4: v1(83.82,48.514) R18.1
main_AC1: D6.3 T1.4 U6.1 | length 27.9
  Top Layer w2: U6.1 31.608,47.259 39.147,39.72 39.147,36.545 D6.3 39.243,32.773 T1.4
main_AC2: D6.2 T1.2 U6.2 | length 34.2
  Top Layer w2: U6.2 33.704,51.259 44.45,40.513 44.45,38.856 44.419,38.825 44.419,36.545 D6.2 44.355,36.417 44.355,29.947 T1.2
NetC5_1: C5.1 NTC1.1 T1.1 | length 13.8
  Top Layer w2: NTC1.1 22.98,22.853 C5.1 28.607,22.885 36.355,22.885 T1.1
NetC5_2: C5.2 F1.2 T1.3 | length 45.1
  Top Layer w2: F1.2 20.955,47.244 27.979,40.22 27.979,38.084 28.21,37.853 C5.2 28.575,30.861 33.655,25.781 37.386,25.781 40.155,23.012 44.29,23.012 T1.3
NetC7_1: C7.1 C12.1 R13.1 U4.8 | length 9.3
  Bottom Layer w0.5: U4.8 90.297,50.606 91.747,49.156 92.891,49.156 C7.1 C12.1@95.123,48.956 ; C12.1 95.45,48.756 95.709,48.756 97.136,47.329 97.136,47.231 97.311,47.056 R13.1@97.409,47.056
NetD3_2: D3.2 Q4.1 Q6.3 R10.1 | length 13
  Bottom Layer w0.4: D3.2 85.259,31.63 87.789,31.63 ; Q4.1 87.442,28.628 88.342,29.528 88.342,30.069 88.751,30.478 ; Q6.3 89.342,33.552 89.242,33.452 89.242,32.954 87.918,31.63 87.789,31.63 ; R10.1 90.541,30.303 90.366,30.478 88.751,30.478 ; 87.789,31.63 88.751,30.668 88.751,30.478
NetD4_2: D4.2 Q7.1 Q9.3 R15.1 | length 14.5
  Bottom Layer w0.4: D4.2@64.262,31.879 D4.2 64.812,31.679 67.945,31.679 ; Q7.1@66.813,28.628 Q7.1 66.938,29.346 67.22,29.628 67.612,29.628 67.963,29.98 67.963,31.443 68.199,31.679 ; Q9.3 69.088,32.822 67.945,31.679 ; R15.1@70.945,30.478 R15.1 70.895,30.303 69.519,31.679 68.199,31.679 ; 67.945,31.679 68.199,31.679
NetD7_2: D7.2 Q10.1 Q12.3 R23.1 | length 13
  Bottom Layer w0.4: D7.2 75.099,31.63 77.629,31.63 ; Q10.1 77.282,28.628 78.182,29.528 78.182,30.027 78.633,30.478 ; Q12.3 79.182,33.552 79.082,33.452 79.082,32.954 77.758,31.63 77.629,31.63 ; R23.1 80.156,30.303 79.981,30.478 78.633,30.478 ; 77.629,31.63 78.633,30.625 78.633,30.478
NetD8_1: D8.1 R12.1 | length 2.1
  Top Layer w0.5: R12.1 56.33,51.091 58.224,51.091 D8.1
NetD8_2: D8.2 Q5.3 | length 2
  Top Layer w0.5: D8.2 58.343,52.784 58.443,52.684 58.443,52.634 58.88,52.197 Q5.3
NetD9_1: D9.1 R14.1 | length 2.1
  Top Layer w0.5: R14.1 56.33,46.392 58.224,46.392 D9.1
NetD9_2: D9.2 Q8.3 | length 2
  Top Layer w0.5: D9.2 59.425,48.085 59.837,47.673 59.837,47.548 59.887,47.498 Q8.3
NetF1_1: F1.1 PC1.1 | length 5.4
  Top Layer w2: F1.1 22.446,40.309 22.446,37.418 PC1.1
NetNTC1_2: NTC1.2 PC1.2 | length 4.4
  Top Layer w2: NTC1.2 PC1.2
NetQ5_2: Q5.1 R19.2 | length 2.1
  Top Layer w0.5: Q5.1 62.287,51.247 62.512,51.022 R19.2
NetQ8_2: Q8.1 R20.2 | length 2.1
  Top Layer w0.5: Q8.1 62.287,46.548 62.512,46.323 R20.2
NetR4_2: R4.2 U3.6 | length 7.1
  Top Layer w0.34: U3.6 76.052,49.657 76.582,49.127 76.639,49.127 77.379,48.387 79.404,48.387 81.182,46.609 R4.2
NetR16_1: R16.1 U4.7 | length 3.3
  Bottom Layer w0.34: R16.1 87.945,54.004 88.2,53.749 88.294,53.749 89.027,53.016 U4.7
NetR18_2: R18.2 U4.6 | length 5.8
  Bottom Layer w0.34: R18.2 84.045,50.48 84.789,49.736 87.51,49.736 87.757,49.983 U4.6
RED: H2.3 Q1.2 | length 17.7
  Top Layer w0.9: Q1.2 87.577,24.945 87.577,23.823 88.104,23.296 91.749,23.296 93.218,24.765 93.218,30.273 H2.3
RST: C8.1 PB1.2 R5.2 U3.7 | length 28
  Top Layer w0.34: C8.1 70.533,48.538 71.954,47.117 ; R5.2 70.583,45.146 71.954,46.517 71.954,47.117 ; U3.7 71.954,47.117
  Top Layer w0.5: C8.1 68.81,48.538 68.36,48.988 68.36,57.057 72.771,61.468 PB1.2
RX: R7.2 R20.1 U3.1 | length 30.1
  Top Layer w0.4: R20.1 64.36,48.223 65.57,47.013 65.57,43.142 67.074,41.638 74.966,41.638 77.905,44.577 U3.1 78.545,44.577 79.856,43.265 85.976,43.265 86.106,43.395 R7.2
RX_b: H1.2 R6.2 | length 7.6
  Top Layer w0.5: R6.2 81.582,52.941 82.374,52.941 86.741,57.308 H1.2
TX: R6.1 R19.1 U3.5 | length 38.1
  Top Layer w0.34: R19.1 64.36,52.922 66.34,50.942 66.34,44.139 v1(67.691,42.788) ; U3.5 75.599,52.197 76.869,50.927 81.346,50.927 v1(81.407,50.866)
  Bottom Layer w0.34: v1(67.691,42.788) 78.312,42.788 80.315,44.791 80.315,49.774 v1(81.407,50.866)
TX_b: H1.3 R7.1 | length 12.5
  Top Layer w0.5: R7.1 86.331,46.609 89.281,49.559 H1.3
WS_B: Q9.1 R17.2 U4.3 | length 27.1
  Bottom Layer w0.5: Q9.1 67.063,32.602 68.013,33.552 68.013,34.866 69.784,36.637 75.732,36.637 77.703,38.608 82.632,38.608 87.437,43.412 87.437,43.459 87.757,43.779 U4.3
WS_G: Q12.1 R24.2 U4.2 | length 19.7
  Bottom Layer w0.4: Q12.1 77.282,32.602 78.282,33.602 78.282,34.848 80.071,36.637 84.643,36.637 89.027,41.021 U4.2
WS_R: Q6.1 R11.2 U4.1 | length 15
  Bottom Layer w0.5: Q6.1 87.442,32.602 88.392,33.552 88.392,34.925 90.104,36.637 R11.2 91.44,42.663 90.297,43.806 U4.1
pads on no net: U4.5

## Keep-outs
Keep-Out Layer:
  the board outline again, w0.254

## Other copper
Top Layer:
  text "RGB controller" at 19.685,61.75 h2
  text "Masoud.B" at 21.592,59.968 h2
  text "summer 2023" at 20.407,58.19 h2
Bottom Layer:
  rectangle net GND: 42.672,52.451 62.738,60.96
  rectangle net GND: 42.672,50.927 50.673,54.102
  rectangle net GND: 68.072,53.34 78.994,57.912
  rectangle net GND: 77.216,51.562 78.994,54.483
  rectangle net GND: 68.072,46.736 74.168,54.102
  rectangle net +3v3: 67.437,43.688 76.581,45.72
  rectangle net +3v3: 55.245,43.688 67.564,51.689

## Text inside footprints (layer, text, board x,y; h text height)
D6: Top Overlay "+" at 49.508,34.524 h0.8 r180; Top Overlay "-" at 34.308,34.524 h0.8 r180; Top Overlay "AC" at 39.783,34.574 h0.8 r180; Top Overlay "AC" at 45.233,34.524 h0.8 r180
U3: Top Overlay "GND" at 77.974,54.483 h1
U6: Top Overlay "AC" at 27.18,47.018 h2; Top Overlay "AC" at 27.18,50.955 h2; Top Overlay "GND" at 46.736,54.638 h2; Top Overlay "+12V" at 46.609,49.05 h2